# Allegro board i8080_two.brd
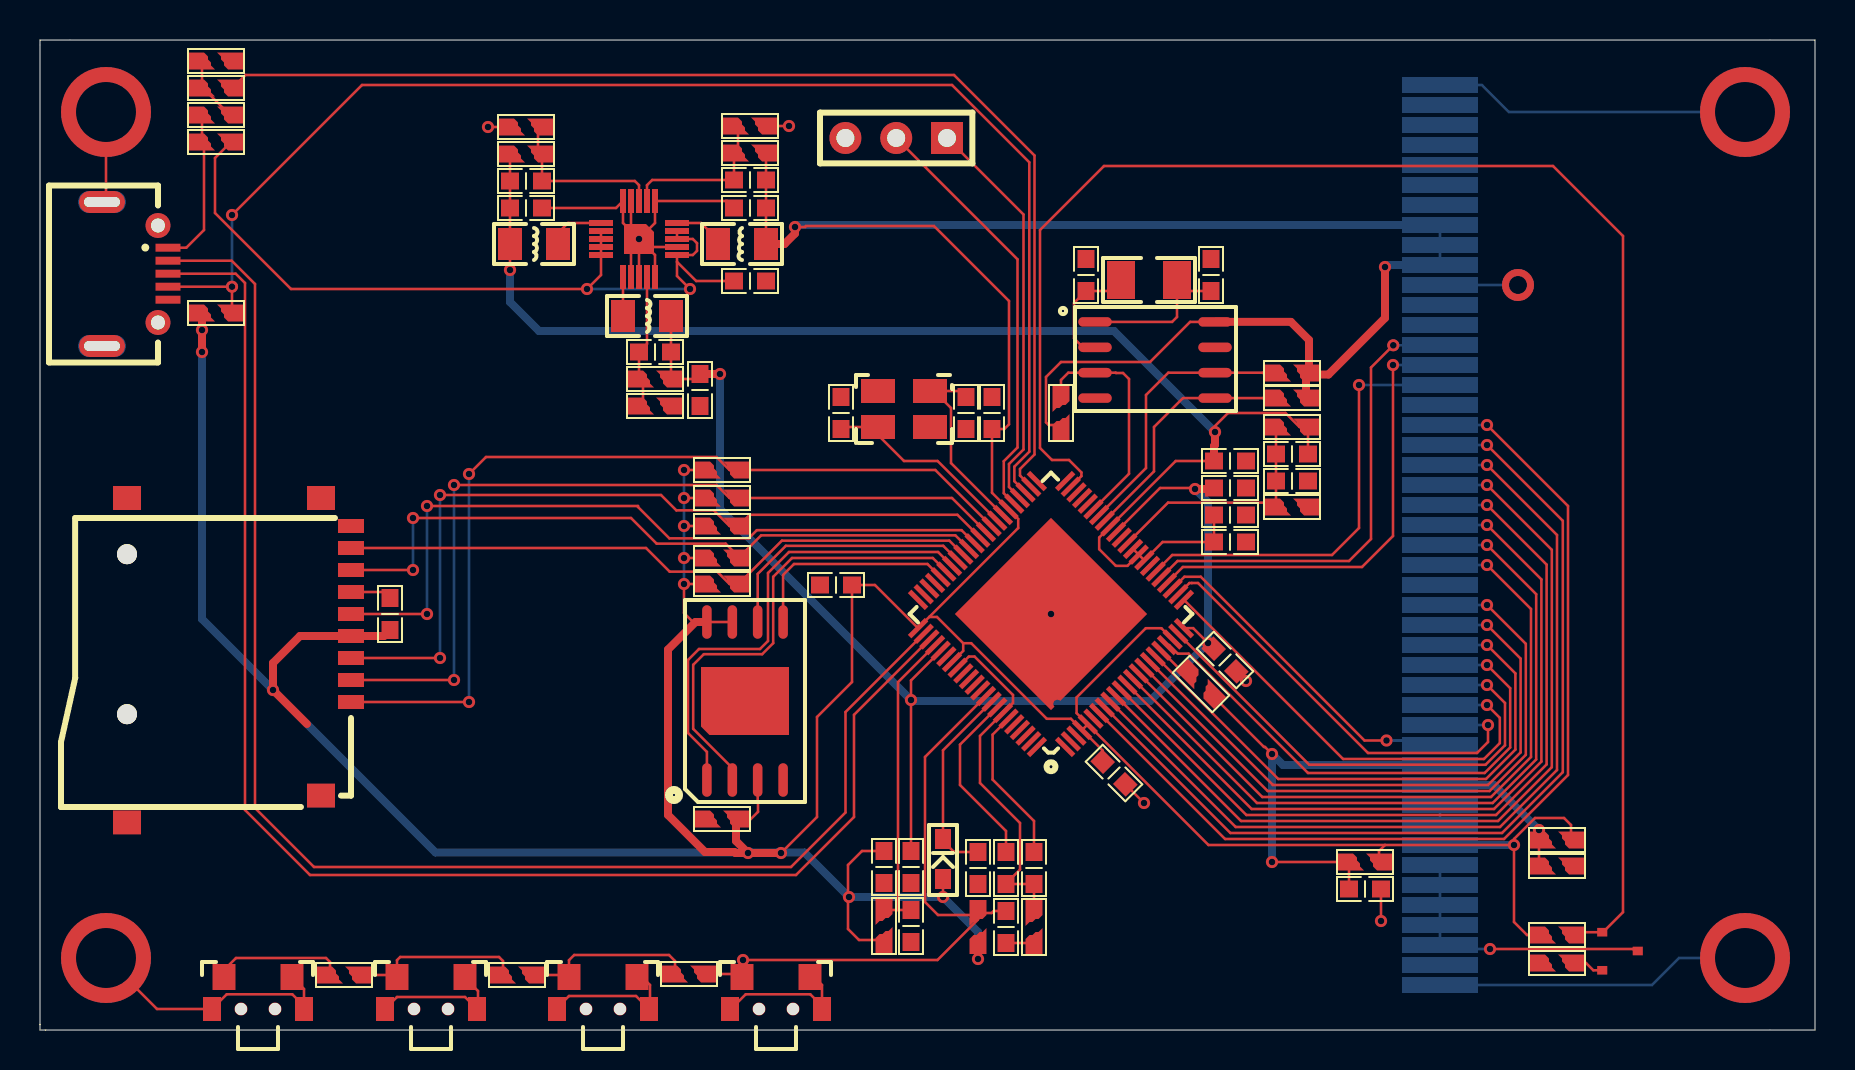
[diagram p0: board, top side]
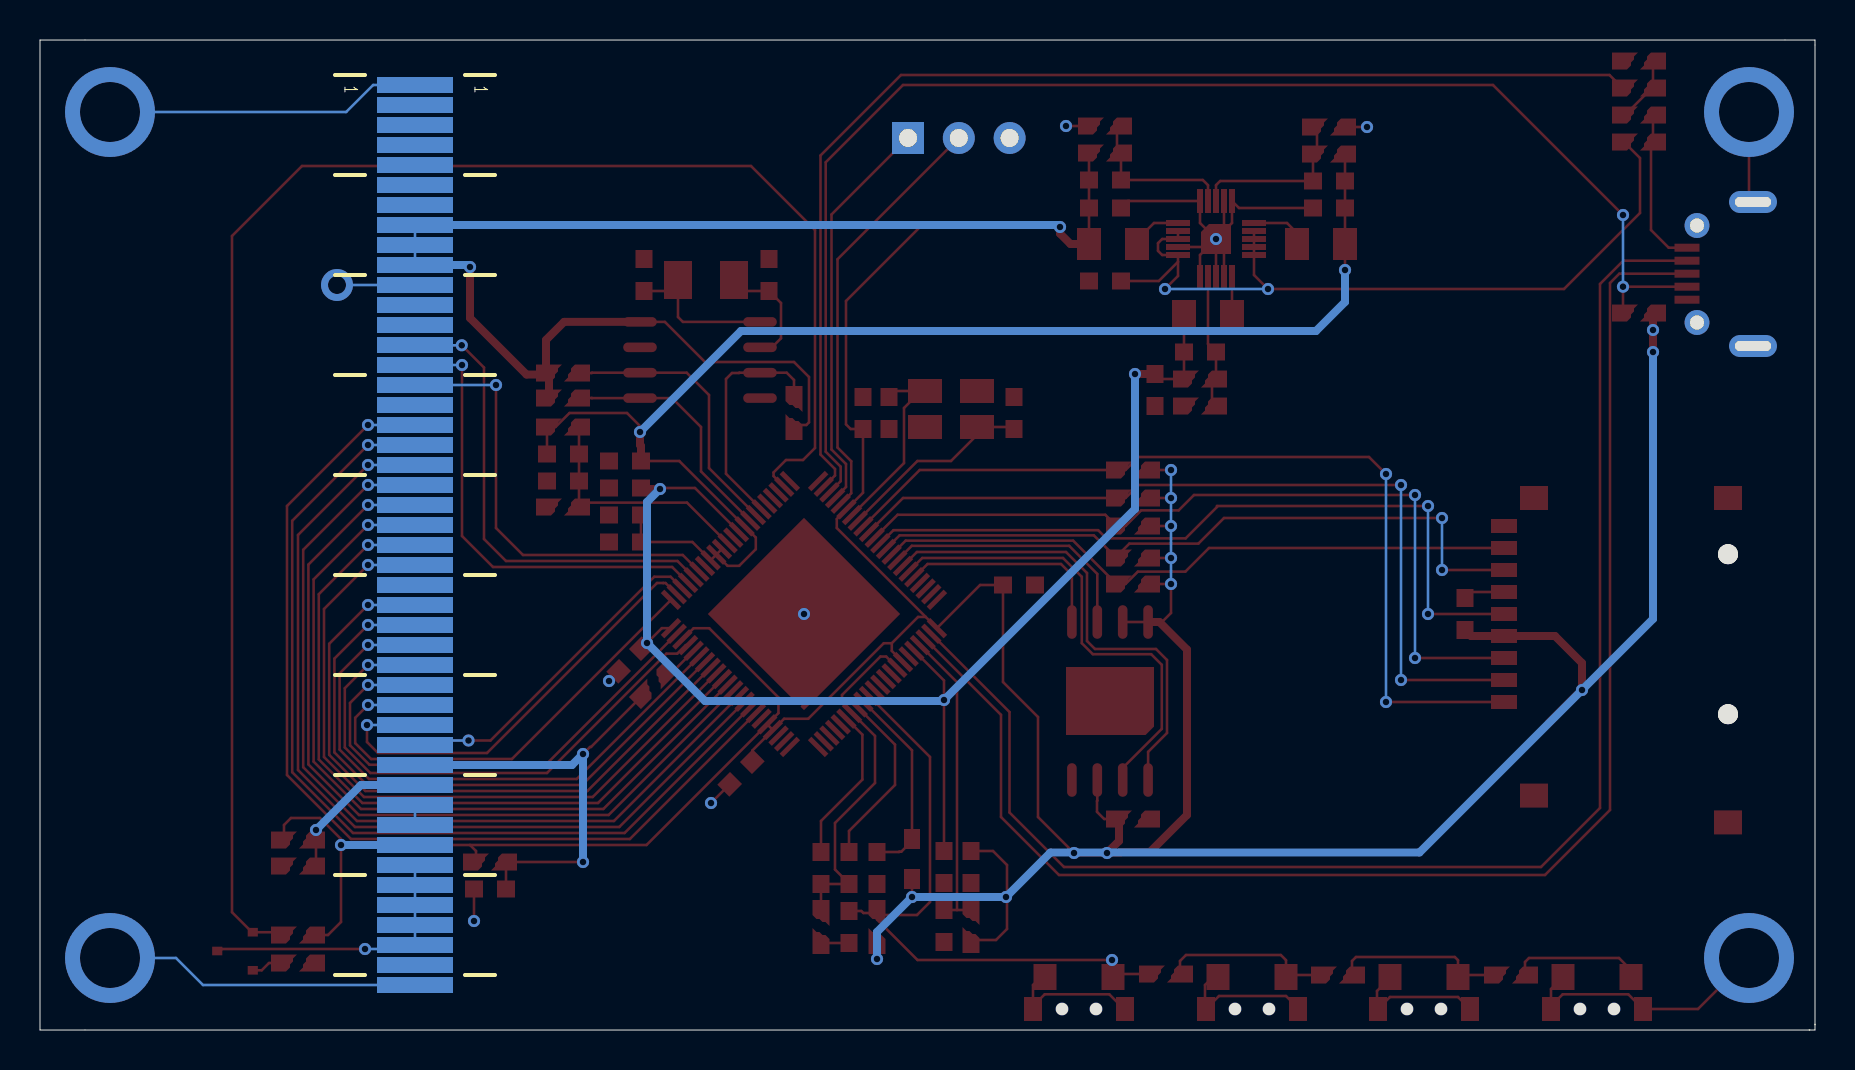
[diagram p1: board, bottom side, seen from below]

Outline 88.75 x 49.5 mm; copper layers: TOP, BOTTOM. Coordinates in mm from the lower left corner of the outline.
Outline path: 0,0.25 0,49.5 88.75,49.5 88.75,0 0.25,0 ; 0,0.3 0,0 0.3,0

## Design rules (mm)
constraint set DEFAULT: min track width 0.13

## Placement (name value [footprint] x y rotation side)
C1  33pF  [CAP0603]  46.3 30.85 90 top
C2  33pF  [CAP0603]  40.05 30.85 270 top
C3  1uF  [CAP0603]  43.55 5.2 270 top
C4  12pF  [CAP0603]  58.55 37.75 270 top
C5  12pF  [CAP0603]  52.3 37.75 270 top
C6  104  [CAP0603]  48.3 5.15 270 top
C7  0.1uF  [CAP0603]  17.5 20.8 90 top
C8  220pF  [CAP0603]  35.5 42.5 0 top
C9  10uF  [CAP0603]  35.5 41.1 0 top
C10  220pF  [CAP0603]  30.75 33.9 180 top
C11  1uF  [CAP0603]  24.3 42.45 0 top
C12  10uF  [CAP0603]  24.3 41.1 0 top
C13  10uF  [CAP0603]  33 32 90 top
C14  0.1uF  [CAP0603]  59.5 25.75 0 top
C15  0.1uF  [CAP0603]  59.5 28.45 0 top
C16  0.1uF  [CAP0603]  59.5 24.4 0 top
C19  0.1uF  [CAP0603]  59.25 18.5 315 top
C20  0.1uF  [CAP0603]  43.55 8.15 270 top
C21  0.1uF  [CAP0603]  59.5 27.1 0 top
C22  0.1uF  [CAP0603]  42.2 8.15 270 top
C23  0.1uF  [CAP0603]  47.6 30.85 90 top
C24  0.1uF  [CAP0603]  53.7 12.85 315 top
C25  1uF  [CAP0603]  35.5 37.45 180 top
C27  0.1uF  [CAP0603]  39.8 22.25 180 top
C29  0.1uF  [CAP0603]  62.6 28.8 180 top
C30  1uF  [CAP0603]  48.3 8.1 270 top
C31  1uF  [CAP0603]  49.7 8.1 270 top
C32  0.1uF  [CAP0603]  46.9 8.1 270 top
C33  0.1uF  [CAP0603]  62.6 27.45 0 top
C35  1uF  [CAP0603]  66.25 7.05 0 top
D1  1N4148  [1N4148-SOD323]  45.15 8.55 270 top
J3  -  [TFT8K3548FPC-A1-E]  70 24.75 0 bottom
J4  USB  [MICROUSB]  5.9 37.8 90 top
J5  Debug  [HEADER1X3_2_54]  45.35 44.6 270 top
J6  -  [TF-SOCKET]  15.55 16.4 270 top
L1  1.5uH  [MLF2012]  35.1 39.3 180 top
L2  1.5uH  [MLF2012]  30.35 35.7 0 top
L3  1.5uH  [MLF2012]  24.7 39.3 0 top
NOREF  -  []  82 49.5 0 top
NOREF#2  -  []  0 49.5 0 top
NOREF#3  -  []  0 0 90 top
NOREF#4  -  []  0 0 0 top
Q1  GP2302  [SOT23]  79 3.95 0 top
R3  10K  [RES0603]  42.2 5.2 270 top
R4  10K/DNP  [RES0603]  75.85 9.5 180 top
R5  10K  [RES0603]  75.85 8.2 0 top
R6  10K  [RES0603]  75.85 4.75 180 top
R7  22R  [RES0603]  75.85 3.35 0 top
R8  0R  [RES0603]  8.8 44.4 0 top
R9  10K  [RES0603]  8.8 35.85 180 top
R10  10K  [RES0603]  8.8 47.1 0 top
R11  10K  [RES0603]  8.8 45.75 0 top
R12  22K  [RES0603]  8.8 48.45 0 top
R13  10K  [RES0603]  34.1 10.55 0 top
R14  10K  [RES0603]  62.6 32.85 0 top
R15  10K  [RES0603]  62.6 31.6 0 top
R16  100K  [RES0603]  46.9 5.15 90 top
R17  10K  [RES0603]  51.05 30.85 270 top
R18  10K  [RES0603]  32.45 2.8 180 top
R19  10K  [RES0603]  23.85 2.75 180 top
R20  10K  [RES0603]  15.2 2.75 180 top
R21  47K  [RES0603]  34.1 28 0 top
R22  47K  [RES0603]  34.1 26.6 0 top
R23  47K  [RES0603]  34.1 25.2 0 top
R24  47K  [RES0603]  34.1 23.6 0 top
R25  47K  [RES0603]  34.1 22.3 0 top
R26  550K  [RES0603]  35.5 43.85 0 top
R27  110K  [RES0603]  35.5 45.2 0 top
R28  47K  [RES0603]  24.3 45.15 180 top
R29  100K  [RES0603]  30.75 31.2 180 top
R30  100K  [RES0603]  30.75 32.55 180 top
R31  152K  [RES0603]  24.3 43.8 0 top
R32  2K  [RES0603]  62.6 30.15 0 top
R35  2K  [RES0603]  62.6 26.15 180 top
R36  0R  [RES0603]  49.7 5.15 90 top
R37  10K  [RES0603]  66.25 8.4 180 top
R38  0R  [RES0603]  58.05 17.3 135 top
SW2  TS_018-4.55x3.5x1.8  [TS_018-4P55X3P5X1P8]  36.8 1.05 270 top
SW3  TS_018-4.55x3.5x1.8  [TS_018-4P55X3P5X1P8]  28.15 1.05 270 top
SW4  TS_018-4.55x3.5x1.8  [TS_018-4P55X3P5X1P8]  19.55 1.05 270 top
SW5  TS_018-4.55x3.5x1.8  [TS_018-4P55X3P5X1P8]  10.9 1.05 270 top
U1  F1C100S  [F1C100S-MQFN]  50.55 20.8 135 top
U2  GD5FxG4UAYIG  [GD5F1GQ4X_W25QXX_SOP8_208MIL]  35.25 16.45 90 top
U3  PCF8563  [PCF8563-SO8-3]  55.75 33.5 0 top
U4  EA3036  [EA3036-QFN20]  29.95 39.55 270 top
Y1  YSX321SL  [YSX321SL-3_2X2_5X0_8]  43.2 31.05 180 top
Y2  32.768KHz  [CRYSTAL-3215]  55.45 37.5 0 top

## Library data of the parts
C1-C16 C19-C25 C27 C29-C33 C35 = CAPACITOR NON-POL
D1 = DIODE
J3 = TFT8K3548FPC_A1_E
J4 = MICROUSB
J5 = HEADER 3
J6 = TF-SOCKET
L1-L3 = INDUCTOR/SM
Q1 = GP2302
R3 R6 R7 R9 R13-R32 R35-R37 = RESISTOR/SM
R4 R5 R8 R10-R12 R38 = RESISTOR
SW2-SW5 = TS_018-4.55x3.5x1.8
U1 = F1C100S
U2 = GD5FxG4UAYIG
U3 = PCF8563-SOP8
U4 = ea3036
Y1 = YSX321SL
Y2 = CRYSTAL/SM

## Footprints (pads in the part's own frame, mm; a bottom-side part is the same pattern mirrored in y, then rotated)
1N4148-SOD323
  custom 1x0.8 smd: 1(-1,0) 2(1,0)
CAP0603
  custom 0.9x0.85 smd: 1(-0.8,0) 2(0.8,0)
CRYSTAL-3215
  custom 1.4x1.9 smd: 1(-1.4,0) 2(1.4,0)
EA3036-QFN20
  custom 1.2x0.3 smd: 1(-1.9,0.8) 2(-1.9,0.4) 3(-1.9,0) 4(-1.9,-0.4) 5(-1.9,-0.8) 11(1.9,-0.8) 12(1.9,-0.4) 13(1.9,0) 14(1.9,0.4) 15(1.9,0.8)
  custom 0.3x1.2 smd: 6(-0.8,-1.9) 7(-0.4,-1.9) 8(0,-1.9) 9(0.4,-1.9) 10(0.8,-1.9) 16(0.8,1.9) 17(0.4,1.9) 18(0,1.9) 19(-0.4,1.9) 20(-0.8,1.9)
  custom 1.5x1.5 smd: 21(0,0)
F1C100S-MQFN
  custom 1.2x0.25 smd: 1(-5.2,4.2) 2(-5.2,3.8) 3(-5.2,3.4) 4(-5.2,3) 5(-5.2,2.6) 6(-5.2,2.2) 7(-5.2,1.8) 8(-5.2,1.4) 9(-5.2,1) 10(-5.2,0.6) 11(-5.2,0.2) 12(-5.2,-0.2) 13(-5.2,-0.6) 14(-5.2,-1) 15(-5.2,-1.4) 16(-5.2,-1.8) 17(-5.2,-2.2) 18(-5.2,-2.6) 19(-5.2,-3) 20(-5.2,-3.4) 21(-5.2,-3.8) 22(-5.2,-4.2) 45(5.2,-4.2) 46(5.2,-3.8) 47(5.2,-3.4) 48(5.2,-3) 49(5.2,-2.6) 50(5.2,-2.2) 51(5.2,-1.8) 52(5.2,-1.4) 53(5.2,-1) 54(5.2,-0.6) 55(5.2,-0.2) 56(5.2,0.2) 57(5.2,0.6) 58(5.2,1) 59(5.2,1.4) 60(5.2,1.8) 61(5.2,2.2) 62(5.2,2.6) 63(5.2,3) 64(5.2,3.4) 65(5.2,3.8) 66(5.2,4.2)
  custom 0.25x1.2 smd: 23(-4.2,-5.2) 24(-3.8,-5.2) 25(-3.4,-5.2) 26(-3,-5.2) 27(-2.6,-5.2) 28(-2.2,-5.2) 29(-1.8,-5.2) 30(-1.4,-5.2) 31(-1,-5.2) 32(-0.6,-5.2) 33(-0.2,-5.2) 34(0.2,-5.2) 35(0.6,-5.2) 36(1,-5.2) 37(1.4,-5.2) 38(1.8,-5.2) 39(2.2,-5.2) 40(2.6,-5.2) 41(3,-5.2) 42(3.4,-5.2) 43(3.8,-5.2) 44(4.2,-5.2) 67(4.2,5.2) 68(3.8,5.2) 69(3.4,5.2) 70(3,5.2) 71(2.6,5.2) 72(2.2,5.2) 73(1.8,5.2) 74(1.4,5.2) 75(1,5.2) 76(0.6,5.2) 77(0.2,5.2) 78(-0.2,5.2) 79(-0.6,5.2) 80(-1,5.2) 81(-1.4,5.2) 82(-1.8,5.2) 83(-2.2,5.2) 84(-2.6,5.2) 85(-3,5.2) 86(-3.4,5.2) 87(-3.8,5.2) 88(-4.2,5.2)
  custom 6.8x6.8 smd: 89(0,0)
GD5F1GQ4X_W25QXX_SOP8_208MIL
  custom 1.68x0.48 smd: 1(-3.95,1.905) 2(-3.95,0.635) 3(-3.95,-0.635) 4(-3.95,-1.905) 5(3.95,-1.905) 6(3.95,-0.635) 7(3.95,0.635) 8(3.95,1.905)
  custom 3.4x4.4 smd: 9(0,0)
HEADER1X3_2_54
  rect 1.6x1.6 hole 0.9: 1(0,0)
  round 1.6 hole 0.9: 2(0,-2.54) 3(0,-5.08)
MICROUSB
  rect 0.4x1.25 smd: 1(1.315,-0.5) 2(0.665,-0.5) 3(0.015,-0.5) 4(-0.635,-0.5) 5(-1.285,-0.5)
  round 1.25 hole 0.7: 6(-2.425,0) 7(2.425,0)
  oval 1.1x2.3 hole 0.5x1.8: 8(-3.6,2.8) 9(3.6,2.8)
MLF2012
  custom 1.2x1.6 smd: 1(-1.2,0) 2(1.2,0)
PCF8563-SO8-3
  custom 1.68x0.48 smd: 1(-3,1.905) 2(-3,0.635) 3(-3,-0.635) 4(-3,-1.905) 5(3,-1.905) 6(3,-0.635) 7(3,0.635) 8(3,1.905)
RES0603
  custom 1.3x0.85 smd: 1(-0.7,0) 2(0.7,0)
SOT23
  rect 0.508x0.432 smd: 1(-0.889,0.94) 2(-0.889,-0.965) 3(0.889,0)
TF-SOCKET
  round 1 hole 1.1 unplated: (-7.39,-11.2) (0.61,-11.2)
  rect 0.7x1.3 smd: 1(0,0) 2(-1.1,0) 3(-2.2,0) 4(-3.3,0) 5(-4.4,0) 6(-5.5,0) 7(-6.6,0) 8(-7.7,0) 9(-8.8,0)
  rect 1.2x1.4 smd: 10(-10.2,-1.5) 11(4.68,-1.5) 12(-10.2,-11.2) 13(6.02,-11.2)
TFT8K3548FPC-A1-E
  custom 3.8x0.8 smd: 1(0,-22.5) 2(0,-21.5) 3(0,-20.5) 4(0,-19.5) 5(0,-18.5) 6(0,-17.5) 7(0,-16.5) 8(0,-15.5) 9(0,-14.5) 10(0,-13.5) 11(0,-12.5) 12(0,-11.5) 13(0,-10.5) 14(0,-9.5) 15(0,-8.5) 16(0,-7.5) 17(0,-6.5) 18(0,-5.5) 19(0,-4.5) 20(0,-3.5) 21(0,-2.5) 22(0,-1.5) 23(0,-0.5) 24(0,0.5) 25(0,1.5) 26(0,2.5) 27(0,3.5) 28(0,4.5) 29(0,5.5) 30(0,6.5) 31(0,7.5) 32(0,8.5) 33(0,9.5) 34(0,10.5) 35(0,11.5) 36(0,12.5) 37(0,13.5) 38(0,14.5) 39(0,15.5) 40(0,16.5) 41(0,17.5) 42(0,18.5) 43(0,19.5) 44(0,20.5) 45(0,21.5) 46(0,22.5)
TS_018-4P55X3P5X1P8
  round 0.65 hole 0.6: (0,0.85) (0,-0.85)
  custom 1.2x0.9 smd: 1(0,2.3) 2(0,-2.3)
  custom 1.3x1.15 smd: 3(-1.6,1.7) 4(-1.6,-1.7)
YSX321SL-3_2X2_5X0_8
  custom 1.7x1.2 smd: 1(-1.3,-0.9) 2(1.3,-0.9) 3(1.3,0.9) 4(-1.3,0.9)

## Nets
1V2: C10.1 C13.2 C19.1 C20.1 C21.1 L2.2 R30.1 U1.22 U1.35 U1.71
2V5: C11.1 C12.1 C14.1 C15.1 C16.1 C29.1 L3.1 R31.1 R32.2 U1.30 U1.31 U1.32 U1.34 U1.36
3V3: C7.1 C8.2 C9.2 C22.1 C23.1 C24.1 C27.1 D1.2 J3.8 J3.9 J3.10 J3.39 J6.4(VDD) L1.1 R3.2 R4.1 R6.2 R9.2 R13.2 R14.2 R15.2 R16.1 R17.2 R21.1 R22.1 R23.1 R24.1 R25.1 R26.2 R37.1 U1.4 U1.5 U1.20 U1.50 U1.67 U1.73 U2.3(W\P\/IO2) U2.7 U2.8 U3.8
5V: C25.2 R8.2 U4.7 U4.8 U4.9 U4.10 U4.16 U4.18 U4.19(VIN3)
AGND: C30.2 C31.2 R36.2 U1.74 U1.82
AVCC: C32.1 D1.1(K) U1.80
GND: C1.1 C2.1 C3.2 C4.1 C5.1 C6.2 C7.2 C9.1 C12.2 C13.1 C14.2 C15.2 C16.2 C19.2 C20.2 C21.2 C22.2 C23.2 C24.2 C25.1 C27.2 C32.2 C33.2 C35.2 J3.1 J3.7 J3.13 J3.37 J3.38 J3.46 J4.5 J4.6 J4.7 J4.8 J4.9 J5.3 J6.6 J6.10 J6.11 J6.12 J6.13 R5.2 R7.1 R12.2 R27.2 R28.2 R29.1 R35.1 R36.1 SW2.1 SW2.2 SW2.3 SW3.1 SW3.2 SW3.3 SW4.1 SW4.2 SW4.3 SW5.1 SW5.2 SW5.3 U1.89 U2.4 U2.9 U3.4(VSS) U4.1 U4.4 U4.5 U4.12 U4.13 U4.15 U4.17 U4.21 Y1.2 Y1.4
VBUS: J4.1(VBUS) R8.1 R11.1
BL: Q1.1 R6.1 U1.43
BS0: J3.36 R4.2 R5.1
D3: J3.18 U1.7
D4: J3.19 U1.8
D5: J3.20 U1.9
D6: J3.21 U1.10
D7: J3.22 U1.11
D10: J3.23 U1.12
D11: J3.24 U1.13
D12: J3.25 U1.14
D13: J3.27 U1.15
D14: J3.28 U1.16
D15: J3.29 U1.17
D19: J3.30 U1.19
D20: J3.31 U1.21
D21: J3.32 U1.23
D22: J3.33 U1.24
D23: J3.34 U1.25
DE: J3.14 U1.27
HPCOM: U1.3
HPCOMFB: U1.2
HPL: U1.1
HPR: U1.88
HSYNC: J3.16 U1.28
LCD_CLK: J3.15 U1.26
LED-: J3.40 J3.41 J3.42 J3.43 J3.44 Q1.3
LINE_IN: U1.86
LRADC: C6.1 R16.2 R18.1 SW2.4 U1.79
MIC_IN: U1.87
NRESET: C35.1 J3.35 R37.2 R38.1
OSCI: C1.2 U1.51 Y1.1
OSCO: C2.2 U1.52 Y1.3(XOUT)
PD0: U1.6
PD12: R38.2 U1.18
PE4: U1.45
PE5: U1.44
PE7: U1.42
PE8: U1.41
PE9: U1.40
RESET: C3.1 R3.1 U1.70
RTC_INT: R17.1 U1.39 U3.3
RTC_OSCI: C4.2 U3.1 Y2.2
RTC_OSCO: C5.2 U3.2 Y2.1
SDC0_CLK: J6.5 U1.56
SDC0_CMD: J6.3 R23.2 U1.55
SDC0_D0: J6.7 R24.2 U1.57
SDC0_D1: J6.8 R25.2 U1.58
SDC0_D2: J6.1 R21.2 U1.53
SDC0_D3: J6.2 R22.2 U1.54
SF_CLK: U1.59 U2.6
SF_CS: R13.1 U1.60 U2.1
SF_MISO: U1.61 U2.2
SF_MOSI: U1.62 U2.5
SVREF: C29.2 C33.1 R32.1 R35.2 U1.33
TE: J3.11
TWI0_SCK: R14.1 U1.38 U3.6
TWI0_SDA: R15.1 U1.37 U3.5
UART0_RX: J5.2 U1.49
UART0_TX: J5.1 U1.48
USB_DET: R10.2 U1.46
USB_DM: J4.2 U1.68
USB_DP: J4.3 U1.69
USB_ID: J4.4 R9.1 U1.47
VRA1: C30.1 U1.81
VRA2: C31.1 U1.83(VRA2)
VSYNC: U1.29
X1: U1.66
X2: U1.65
Y1: U1.64
Y2: U1.63
N101915: C8.1 R26.1 R27.1 U4.2
N101919: C11.2 R28.1 R31.2 U4.3
N101966: C10.2 R29.2 R30.2 U4.14
N131139: L3.2 U4.6
N132697: L1.2 U4.20
N136168: L2.1 U4.11
N235998: R18.2 R19.1 SW3.4
N236006: R19.2 R20.1 SW4.4
N236014: R20.2 SW5.4
N15766837: R10.1 R11.2 R12.1
N15767318: Q1.2(SOURCE) R7.2

Pads without a net: J3 2 3 4 5 6 12 17 26 45; J6 9; U1 72 75 76 77 78 84 85; U3 7

## Via types
v1: diameter 0.61, hole 0.33, TOP to BOTTOM, 67 vias
v2: diameter 1.6, hole 0.9, TOP to BOTTOM, 1 via
v3: diameter 4.5, hole 3, TOP to BOTTOM, 4 vias

## Routing (per net, layer and track width the routed paths; a pad name or vN(x,y) marks a point on that pad's centre or on a via; arc(x,y) is an arc through that point)
1V2: length 69.5
  TOP w0.13: C19.1 v1(58.4,19.35) 57.66,20.09 U1.22 ; C21.1 56,27.1 U1.35 ; U1.71 43.55,17.48 v1(43.55,16.5) C20.1 ; L2.2 C10.1 31.55,32.65 R30.1 32.75,32.55 C13.2
  TOP w0.4: C21.1 58.65,27.05 v1(57.75,27.05) ; C13.2 v1(34,32.8)
  BOTTOM w0.4: v1(57.75,27.05) 58.4,26.4 v1(58.4,19.35) 55.5,16.45 43.6,16.45 v1(43.55,16.5) 34,26.05 v1(34,32.8)
2V5: length 70.8
  TOP w0.13: C14.1 C16.1 56.13,24.4 55.22,23.49 U1.31 ; R31.1 23.5,43.7 C11.1 C12.1 L3.1 v1(23.5,38) ; 58.7,29.2 58.7,30.15 59.4,30.85 62.27,30.85 62.98,30.15 R32.2 63.4,30.05 C29.1 ; U1.31 54.37,23.21 53.79,23.21 52.96,24.04 52.96,24.62 U1.36 56.79,28.45 C15.1 ; U1.31 U1.32
  TOP w0.4: v1(58.75,29.9) 58.75,29.25 58.7,29.2 C15.1
  BOTTOM w0.4: v1(58.75,29.9) 53.7,34.95 24.95,34.95 23.5,36.4 v1(23.5,38)
3V3: length 303.2
  TOP w0.13: v1(40.45,6.65) 40.45,6.75 40.4,6.8 ; C22.1 41.1,8.95 40.4,8.25 40.4,6.8 ; R4.1 76.55,10.25 76.2,10.6 74.75,10.6 73.7,9.55 v1(73.7,9.25) ; v1(73.7,9.25) 67.25,9.25 ; v1(73.7,9.25) 73.7,5.4 74.35,4.75 R6.2 ; 67.25,9.25 66.95,8.95 R37.1 ; 67.25,9.25 58.42,9.25 U1.5 ; v1(32.2,26.6) R22.1 ; C24.1 53.13,13.97 U1.4 ; L1.1 C9.2 C8.2 36.3,43.75 R26.2 ; 44.46,20.65 U1.67 41.75,22.25 C27.1 40.6,17.4 38.85,15.65 38.85,10.65 v1(37.05,8.85) ; 44.46,20.65 44.85,20.65 46.16,19.34 ; 44.46,20.65 48.91,25.1 48.91,25.55 U1.50 47.6,26.86 C23.1 48.22,30.05 48.45,30.28 48.45,36.45 44.7,40.2 38.3,40.2 38.25,40.15 v1(37.75,40.15) ; 46.16,19.34 46.56,19.34 50.34,15.56 51.55,15.56 U1.4 ; 46.16,19.34 46.16,18.96 U1.73 ; U2.3 35.88,11.47 35.9,11.45 35.9,10.91 35.54,10.55 R13.2 ; v1(32.2,23.6) R24.1 ; 32.78,20.4 32.65,20.4 32.2,20.85 v1(32.2,22.3) R25.1 ; v1(32.2,25.2) R23.1 ; R21.1 v1(32.2,28) ; U1.4 U1.5 ; U1.5 51.83,15.84 51.83,16.63 55.29,20.09 56.07,20.09 U1.20 ; R17.2 50.95,30.25 50.43,30.25 50.3,30.38 50.3,32.65 51.05,33.4 55.5,33.4 57.51,35.41 U3.8 ; R3.2 40.95,4.5 40.4,5.05 40.4,6.8 ; D1.2 v1(45.15,6.65) ; U2.8 U2.7
  TOP w0.4: v1(35.4,8.85) 34.8,9.45 R13.2 ; v1(35.4,8.85) 34.77,8.85 34.72,8.9 33.25,8.9 31.4,10.75 31.4,19.02 32.78,20.4 U2.8 ; v1(35.4,8.85) v1(37.05,8.85) ; R14.2 R15.2 ; R14.2 63.38,32.77 64.42,32.77 67.25,35.6 v1(67.25,38.15) ; R14.2 63.45,33 63.45,34.5 62.55,35.41 U3.8 ; v1(46.9,3.55) R16.1 ; v1(37.75,40.15) 37.75,39.82 37.23,39.3 L1.1 ; v1(8.1,33.9) v1(8.1,35) R9.2 ; C7.1 17.2,19.7 J6.4 13,19.7 11.65,18.35 v1(11.65,17) 13.35,15.3
  BOTTOM w0.13: v1(32.2,28) v1(32.2,26.6) v1(32.2,25.2) v1(32.2,23.6) v1(32.2,22.3) ; v1(37.05,8.85) 38.25,8.85 ; J3.10 J3.9 J3.8
  BOTTOM w0.4: J3.39 v1(73.7,9.25) ; J3.10 67.35,38.25 v1(67.25,38.15) ; v1(8.1,33.9) 8.1,20.55 v1(11.65,17) 19.77,8.88 38.22,8.88 v1(40.45,6.65) v1(45.15,6.65) 46.9,4.9 v1(46.9,3.55) ; J3.8 37.85,40.25 v1(37.75,40.15)
5V: length 40.5
  TOP w0.13: 31.85,38.41 U4.16 32.64,38.75 32.85,38.96 32.85,39.34 32.64,39.55 U4.18 U4.19 ; 31.85,38.41 32.81,37.45 C25.2 ; 31.85,38.41 31.85,37.7 v1(32.5,37.05) ; U4.7 U4.8 U4.9 U4.10 28.05,37.75 v1(27.35,37.05) 12.55,37.05 8.75,40.85 8.75,43.6 9.5,44.35 R8.2
  BOTTOM w0.13: v1(27.35,37.05) v1(32.5,37.05)
AGND: length 17.9
  TOP w0.13: R36.2 C31.2 C30.2 48.3,7.32 49,8.02 49,10.35 47,12.35 47,14.7 U1.82 48.15,15.85 48.65,16.35 48.65,16.75 46.73,18.67 46.44,18.67 45.88,18.11
AVCC: length 10
  TOP w0.13: U1.80 45.15,13.99 D1.1 45.15,9.45 45.69,8.91 45.79,8.91 45.8,8.9 C32.1
GND: length 103.4
  TOP w0.13: SW3.2 25.85,1.1 26.45,1.7 29.8,1.7 SW3.1 30.5,1.1 30.5,2.25 30.1,2.65 SW3.3 ; C12.2 28.8,41.1 U4.5 29.15,40.35 29.55,39.95 ; 39.1,1.2 SW2.1 ; 39.1,1.2 38.51,1.79 35.29,1.79 34.55,1.05 SW2.2 ; 39.1,1.2 39.1,2.25 38.7,2.65 SW2.3 ; v3(3.3,3.6) 5.85,1.05 SW5.2 9.34,1.79 12.61,1.79 13.2,1.2 ; 13.2,1.2 SW5.1 ; 13.2,1.2 13.2,2.05 SW5.3 ; U4.15 30.75,38.75 30.35,39.15 ; 29.55,39.95 v1(29.95,39.55) ; 29.55,39.95 U4.4 ; J6.6 17.2,21.9 C7.2 ; C6.2 49.6,4.35 R36.1 ; C24.2 v1(55.2,11.35) ; v1(29.95,39.55) 30.75,40.35 U4.1 34.35,41.45 C9.1 ; v1(29.95,39.55) U4.13 ; v1(29.95,39.55) 30.35,39.15 ; v1(29.95,39.55) 29.55,39.15 U4.12 ; R28.2 v1(22.4,45.15) ; 30.35,39.15 U4.17 ; C35.2 v1(67.05,5.45) ; C19.2 v1(60.3,17.45) ; SW4.3 21.25,2.6 21.9,1.95 21.9,1.1 SW4.1 21.25,1.65 17.85,1.65 SW4.2 ; v3(3.3,45.9) 3.3,41.6 J4.9 ; R27.2 v1(37.45,45.2)
  BOTTOM w0.13: J3.37 J3.38 ; J3.46 80.6,2.25 81.95,3.6 v3(85.25,3.6) ; v3(85.25,45.9) 73.44,45.9 72.09,47.25 J3.1
  vias: v1(50.55,20.8)
VBUS: length 8
  TOP w0.13: J4.1 7.31,39.12 8.2,40 8.2,44.3 R8.1 R11.1
BL: length 83.2
  TOP w0.13: U1.43 52.07,27.7 52.07,27.88 51.45,28.5 50.6,28.5 50,29.1 50,40 53.2,43.2 75.65,43.2 79.15,39.7 79.15,5.89 78.15,4.89 Q1.1 76.69,4.89 R6.1
BS0: length 7.8
  TOP w0.13: v1(74.95,10) 74.95,8.4 R5.1
  BOTTOM w0.4: J3.36 72.7,12.25 v1(74.95,10)
D3: length 48.9
  TOP w0.13: U1.7 59.25,9.55 73.2,9.55 76.4,12.75 76.4,26.2 v1(72.35,30.25)
  BOTTOM w0.13: v1(72.35,30.25) J3.18
D4: length 47
  TOP w0.13: 53.24,16.13 59.52,9.85 73.1,9.85 76.14,12.89 76.14,25.46 v1(72.35,29.25)
  BOTTOM w0.13: v1(72.35,29.25) J3.19
D5: length 45.2
  TOP w0.13: v1(72.35,28.25) 75.85,24.75 75.85,13 73,10.15 59.79,10.15 U1.9
  BOTTOM w0.13: v1(72.35,28.25) J3.20
D6: length 43.3
  TOP w0.13: v1(72.35,27.25) 75.59,24.01 75.59,13.14 72.9,10.45 60.05,10.45 U1.10
  BOTTOM w0.13: v1(72.35,27.25) J3.21
D7: length 41.4
  TOP w0.13: v1(72.35,26.25) 75.33,23.27 75.33,13.28 72.8,10.75 60.32,10.75 U1.11
  BOTTOM w0.13: v1(72.35,26.25) J3.22
D10: length 39.6
  TOP w0.13: v1(72.35,25.25) 75.07,22.53 75.07,13.42 72.7,11.05 60.58,11.05 U1.12
  BOTTOM w0.13: v1(72.35,25.25) J3.23
D11: length 37.7
  TOP w0.13: v1(72.35,24.25) 74.81,21.79 74.81,13.53 72.63,11.35 60.85,11.35 U1.13
  BOTTOM w0.13: v1(72.35,24.25) J3.24
D12: length 35.9
  TOP w0.13: U1.14 61.11,11.65 72.55,11.65 74.55,13.65 74.55,21.05 v1(72.35,23.25)
  BOTTOM w0.13: v1(72.35,23.25) J3.25
D13: length 33
  TOP w0.13: v1(72.35,21.25) 74.29,19.31 74.29,13.76 72.48,11.95 61.38,11.95 55.22,18.11
  BOTTOM w0.13: v1(72.35,21.25) J3.27
D14: length 31.2
  TOP w0.13: U1.16 61.65,12.25 72.4,12.25 74.03,13.88 74.03,18.57 v1(72.35,20.25)
  BOTTOM w0.13: v1(72.35,20.25) J3.28
D15: length 29.3
  TOP w0.13: U1.17 61.91,12.55 72.3,12.55 73.77,14.02 73.77,17.83 v1(72.35,19.25)
  BOTTOM w0.13: v1(72.35,19.25) J3.29
D19: length 27.3
  TOP w0.13: v1(72.35,18.25) 73.51,17.09 73.51,14.13 72.23,12.85 63.4,12.85 57.43,18.82 56.89,18.82 56.46,19.24 U1.19
  BOTTOM w0.13: v1(72.35,18.25) J3.30
D20: length 25.2
  TOP w0.13: v1(72.35,17.25) 73.25,16.35 73.25,14.24 72.28,13.26 63.46,13.26 U1.21
  BOTTOM w0.13: v1(72.35,17.25) J3.31
D21: length 23.9
  TOP w0.13: U1.23 65.15,13.55 72.2,13.55 72.99,14.34 72.99,15.61 v1(72.35,16.25)
  BOTTOM w0.13: v1(72.35,16.25) J3.32
D22: length 22.7
  TOP w0.13: v1(72.4,15.25) 72.4,14.4 71.85,13.85 66.4,13.85 57.9,22.35 57.59,22.35 57.47,22.35 U1.24
  BOTTOM w0.13: v1(72.4,15.25) J3.33
D23: length 17.1
  TOP w0.13: v1(67.33,14.47) 66.22,14.47 58.04,22.66 57.22,22.66 U1.25
  BOTTOM w0.13: v1(67.33,14.47) 69.78,14.47 J3.34
DE: length 23.8
  TOP w0.13: U1.27 56.88,23.45 65.45,23.45 66.55,24.55 66.55,33.12 v1(67.66,34.24)
  BOTTOM w0.13: J3.14 69.99,34.24 v1(67.66,34.24)
HSYNC: length 22.3
  TOP w0.13: v1(65.95,32.25) 65.95,25.1 64.6,23.75 56.61,23.75 U1.28
  BOTTOM w0.13: v1(65.95,32.25) J3.16
LCD_CLK: length 23.2
  TOP w0.13: v1(67.65,33.25) 67.65,24.7 66.1,23.15 57.14,23.15 U1.26
  BOTTOM w0.13: v1(67.65,33.25) J3.15
LED-: length 14
  TOP w0.13: Q1.3 79.75,3.95 79.65,4.05 v1(72.5,4.05)
  BOTTOM w0.13: J3.40 J3.41 J3.42 J3.43 J3.44 70.2,4.05 v1(72.5,4.05)
LRADC: length 31.8
  TOP w0.13: R16.2 47.58,5.85 47.68,5.95 C6.1 ; R16.2 46.9,5.52 44.88,3.5 v1(35.15,3.5) 35.15,2.7 SW2.4 34.95,2.8 R18.1 ; R16.2 46.8,5.75 44.9,5.75 44.25,6.4 44.25,13.65 U1.79
NRESET: length 23.7
  TOP w0.13: R38.1 61.2,14.15 61.25,14.15 v1(61.6,13.8) ; C35.1 65.45,8.3 R37.2 v1(61.6,8.4)
  BOTTOM w0.4: J3.35 62.15,13.25 v1(61.6,13.8) v1(61.6,8.4)
OSCI: length 9.6
  TOP w0.13: Y1.1 44.7,31.95 ; 44.7,31.95 45.55,31.1 45.55,28.35 U1.51 ; 44.7,31.95 46.05,31.95 46.3,31.7 C1.2
OSCO: length 10
  TOP w0.13: C2.2 40.15,30.15 Y1.3 41.9,29.75 43.2,28.45 44.88,28.45 47.86,25.47
PD12: length 2
  TOP w0.13: U1.18 57.23,17.8 R38.2
RESET: length 15.4
  TOP w0.13: 42.9,6 42.9,17.39 U1.70 ; 42.9,6 42.3,6 R3.1 ; 42.9,6 C3.1
RTC_INT: length 11.9
  TOP w0.13: R17.1 51.05,32.5 51.41,32.87 U3.3 53.78,32.87 53.8,32.85 54.15,32.85 54.45,32.55 54.45,27.81 U1.39
RTC_OSCI: length 8
  TOP w0.13: C4.2 57.4,36.95 Y2.2 56.85,35.65 56.61,35.41 U3.1
RTC_OSCO: length 5.8
  TOP w0.13: U3.2 52.15,34.13 51.7,34.59 51.7,36.35 C5.2 53.5,36.95 Y2.1
SDC0_CLK: length 37.7
  TOP w0.13: J6.5 v1(19.35,20.8) ; v1(19.35,26.2) 29.9,26.2 29.9,26.15 31.47,24.58 35.43,24.58 35.84,24.99 46.08,24.99 U1.56
  BOTTOM w0.13: v1(19.35,20.8) v1(19.35,26.2)
SDC0_CMD: length 41
  TOP w0.13: U1.55 45.87,25.76 35.49,25.76 34.92,25.2 R23.2 34.48,25.2 33.7,25.98 31.82,25.98 31.05,26.75 v1(20,26.75) ; J6.3 v1(20,18.6)
  BOTTOM w0.13: v1(20,18.6) v1(20,26.75)
SDC0_D0: length 35.2
  TOP w0.13: U1.57 45.77,24.73 36.05,24.73 34.92,23.6 R24.2 34.8,23.8 34.28,24.32 30.83,24.32 29.55,25.6 v1(18.65,25.6) ; J6.7 v1(18.65,23)
  BOTTOM w0.13: v1(18.65,23) v1(18.65,25.6)
SDC0_D1: length 32.6
  TOP w0.13: U1.58 45.47,24.47 37.09,24.47 34.92,22.3 R25.2 34.48,22.3 33.86,22.92 31.48,22.92 30.3,24.1 J6.8
SDC0_D2: length 45.2
  TOP w0.13: J6.1 v1(21.45,16.4) ; v1(21.45,27.8) 22.3,28.65 33.83,28.65 34.48,28 R21.2 44.76,28 U1.53
  BOTTOM w0.13: v1(21.45,16.4) v1(21.45,27.8)
SDC0_D3: length 42.5
  TOP w0.13: v1(20.7,27.25) 33.83,27.25 34.48,26.6 R22.2 45.6,26.6 U1.54 ; J6.2 v1(20.7,17.5)
  BOTTOM w0.13: v1(20.7,17.5) v1(20.7,27.25)
SF_CLK: length 13.3
  TOP w0.13: 45.88,23.49 45.16,24.21 37.29,24.21 35.88,22.8 U2.6
SF_CS: length 24.1
  TOP w0.13: U2.1 33.34,13.9 32.4,14.85 32.4,18.5 32.95,19.05 36,19.05 36.4,19.45 36.4,22.85 37.45,23.9 44.9,23.9 U1.60
SF_MISO: length 23.7
  TOP w0.13: U1.61 44.64,23.6 37.6,23.6 36.66,22.66 36.66,19.34 36.11,18.79 33.19,18.79 32.66,18.26 32.66,15.05 34.62,13.1 U2.2
SF_MOSI: length 10.7
  TOP w0.13: U1.62 44.37,23.3 37.7,23.3 37.16,22.75 U2.5
SVREF: length 12.4
  TOP w0.13: R32.1 61.8,30.05 C29.2 C33.1 61.8,26.25 ; U1.33 56.4,26.37 61.68,26.37 61.8,26.25 ; 61.8,26.25 R35.2
TE: length 3.9
  BOTTOM w0.13: J3.11 v2(73.9,37.25)
TWI0_SCK: length 14
  TOP w0.13: U1.38 55.3,28.1 55.3,31.75 56.41,32.87 U3.6 61.14,32.87 61.16,32.85 R14.1
TWI0_SDA: length 12.5
  TOP w0.13: R15.1 61.16,31.6 61.15,31.59 U3.5 57.14,31.59 55.7,30.15 55.7,27.93 53.24,25.47
UART0_RX: length 21.3
  TOP w0.13: U1.49 48.19,26.84 48.19,28.44 48.88,29.12 48.88,38.53 J5.2
UART0_TX: length 20.1
  TOP w0.13: U1.48 48.99,26.61 48.45,27.15 48.45,28.3 49.17,29.02 49.17,40.77 J5.1
USB_DET: length 59.3
  TOP w0.13: R10.2 9.62,47.1 10.27,47.75 45.7,47.75 49.73,43.73 49.73,28.77 49,28.05 49,27.72 U1.46
USB_DM: length 73.5
  TOP w0.13: U1.68 40.27,15.9 40.27,10.88 37.55,8.15 13.7,8.15 10.75,11.1 10.75,37.3 9.59,38.47 J4.2
USB_DP: length 73.8
  TOP w0.13: U1.69 40.7,15.76 40.7,10.65 37.8,7.75 13.5,7.75 10.25,11 10.25,37.35 9.78,37.81 6.4,37.81
USB_ID: length 69.3
  TOP w0.13: v1(9.6,40.75) 16.1,47.25 45.6,47.25 49.47,43.39 49.47,28.91 48.72,28.17 48.72,27.44 U1.47 ; R9.1 9.6,35.95 v1(9.6,37.16) J4.4
  BOTTOM w0.13: v1(9.6,37.16) v1(9.6,40.75)
VRA1: length 9
  TOP w0.13: C30.1 48.3,9.95 46,12.25 46,14.27 47.86,16.13
VRA2: length 7.9
  TOP w0.13: U1.83 47.63,14.77 47.63,12.52 49.7,10.45 C31.1
N101915: length 8.1
  TOP w0.13: U4.2 30.35,42.24 30.61,42.5 C8.1 34.7,43.75 R26.1 34.9,43.95 34.9,45.1 R27.1
N101919: length 8.6
  TOP w0.13: R28.1 24.9,45.05 24.9,43.9 R31.2 25.1,43.7 C11.2 29.74,42.45 29.95,42.24 U4.3
N101966: length 6.7
  TOP w0.13: U4.14 30.35,34.3 C10.2 29.95,32.65 R30.2 30.15,32.45 30.15,31.3 R29.2
N131139: length 2.9
  TOP w0.13: U4.6 26.4,40.35 25.9,39.85 L3.2
N132697: length 2.6
  TOP w0.13: U4.20 33.05,40.35 33.9,39.5 L1.2
N136168: length 2
  TOP w0.13: L2.1 U4.11
N235998: length 9
  TOP w0.13: R18.2 31.75,3.45 31.45,3.75 26.71,3.75 26.45,3.49 SW3.4 26.35,2.75 R19.1
N236006: length 9
  TOP w0.13: R20.1 17.75,2.75 SW4.4 17.85,3.49 18.01,3.65 22.95,3.65 23.15,3.45 R19.2
N236014: length 6.6
  TOP w0.13: R20.2 14.5,3.4 14.3,3.6 9.8,3.6 9.2,3 SW5.4
N15766837: length 3.3
  TOP w0.13: R11.2 8.15,47.1 R10.1 R12.1
N15767318: length 1.7
  TOP w0.13: R7.2 77.3,3.35 77.66,2.98 Q1.2
